# EAGLE board MicroMod_Environmental-Panel (EAGLE 9.6.2)
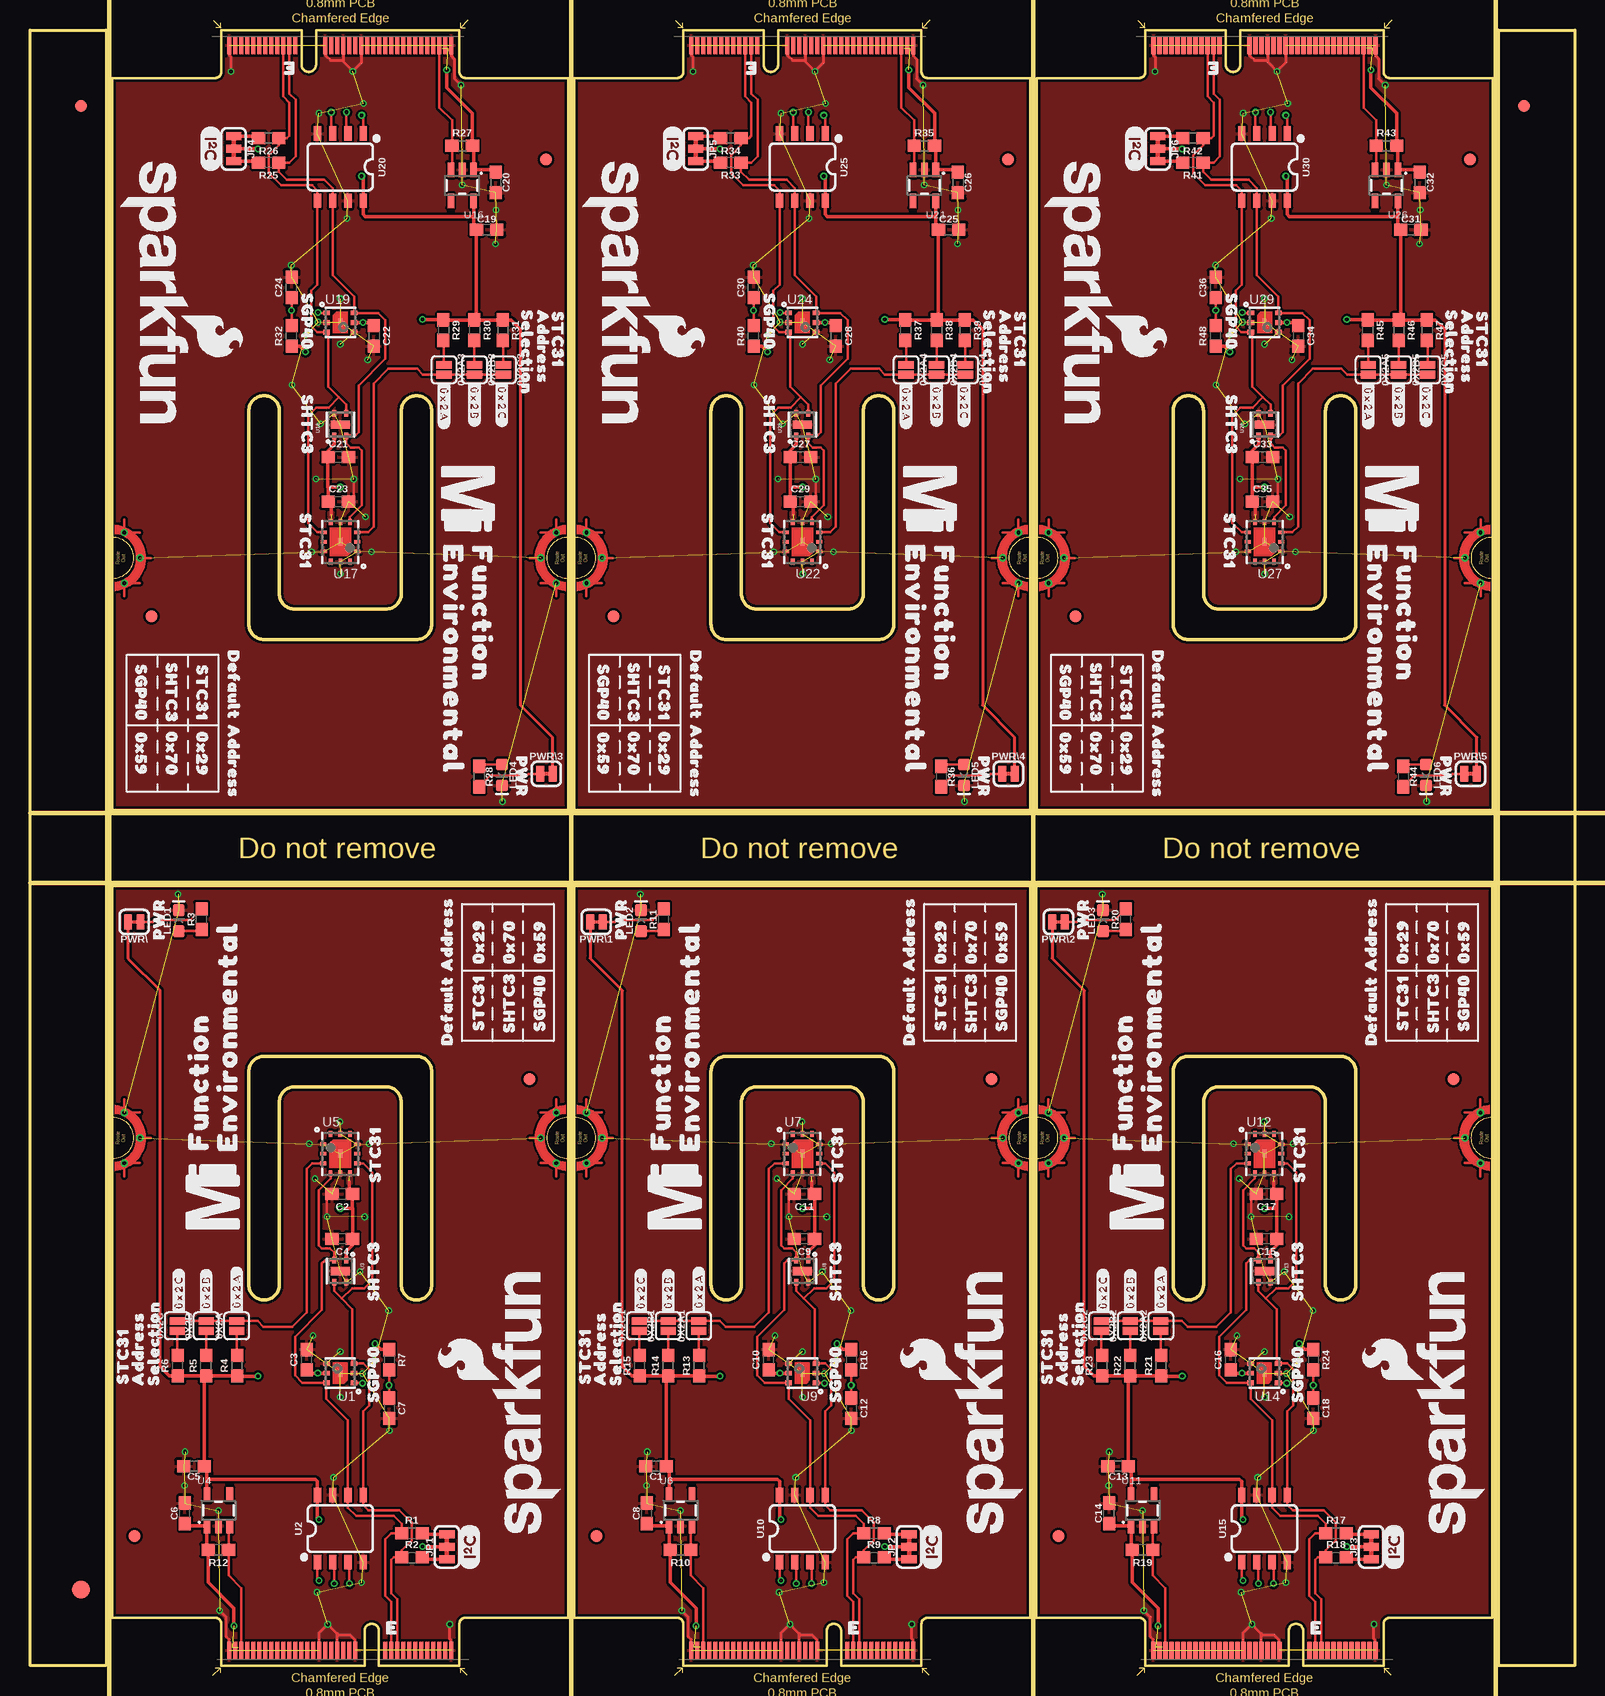
[diagram p0: board, top side]
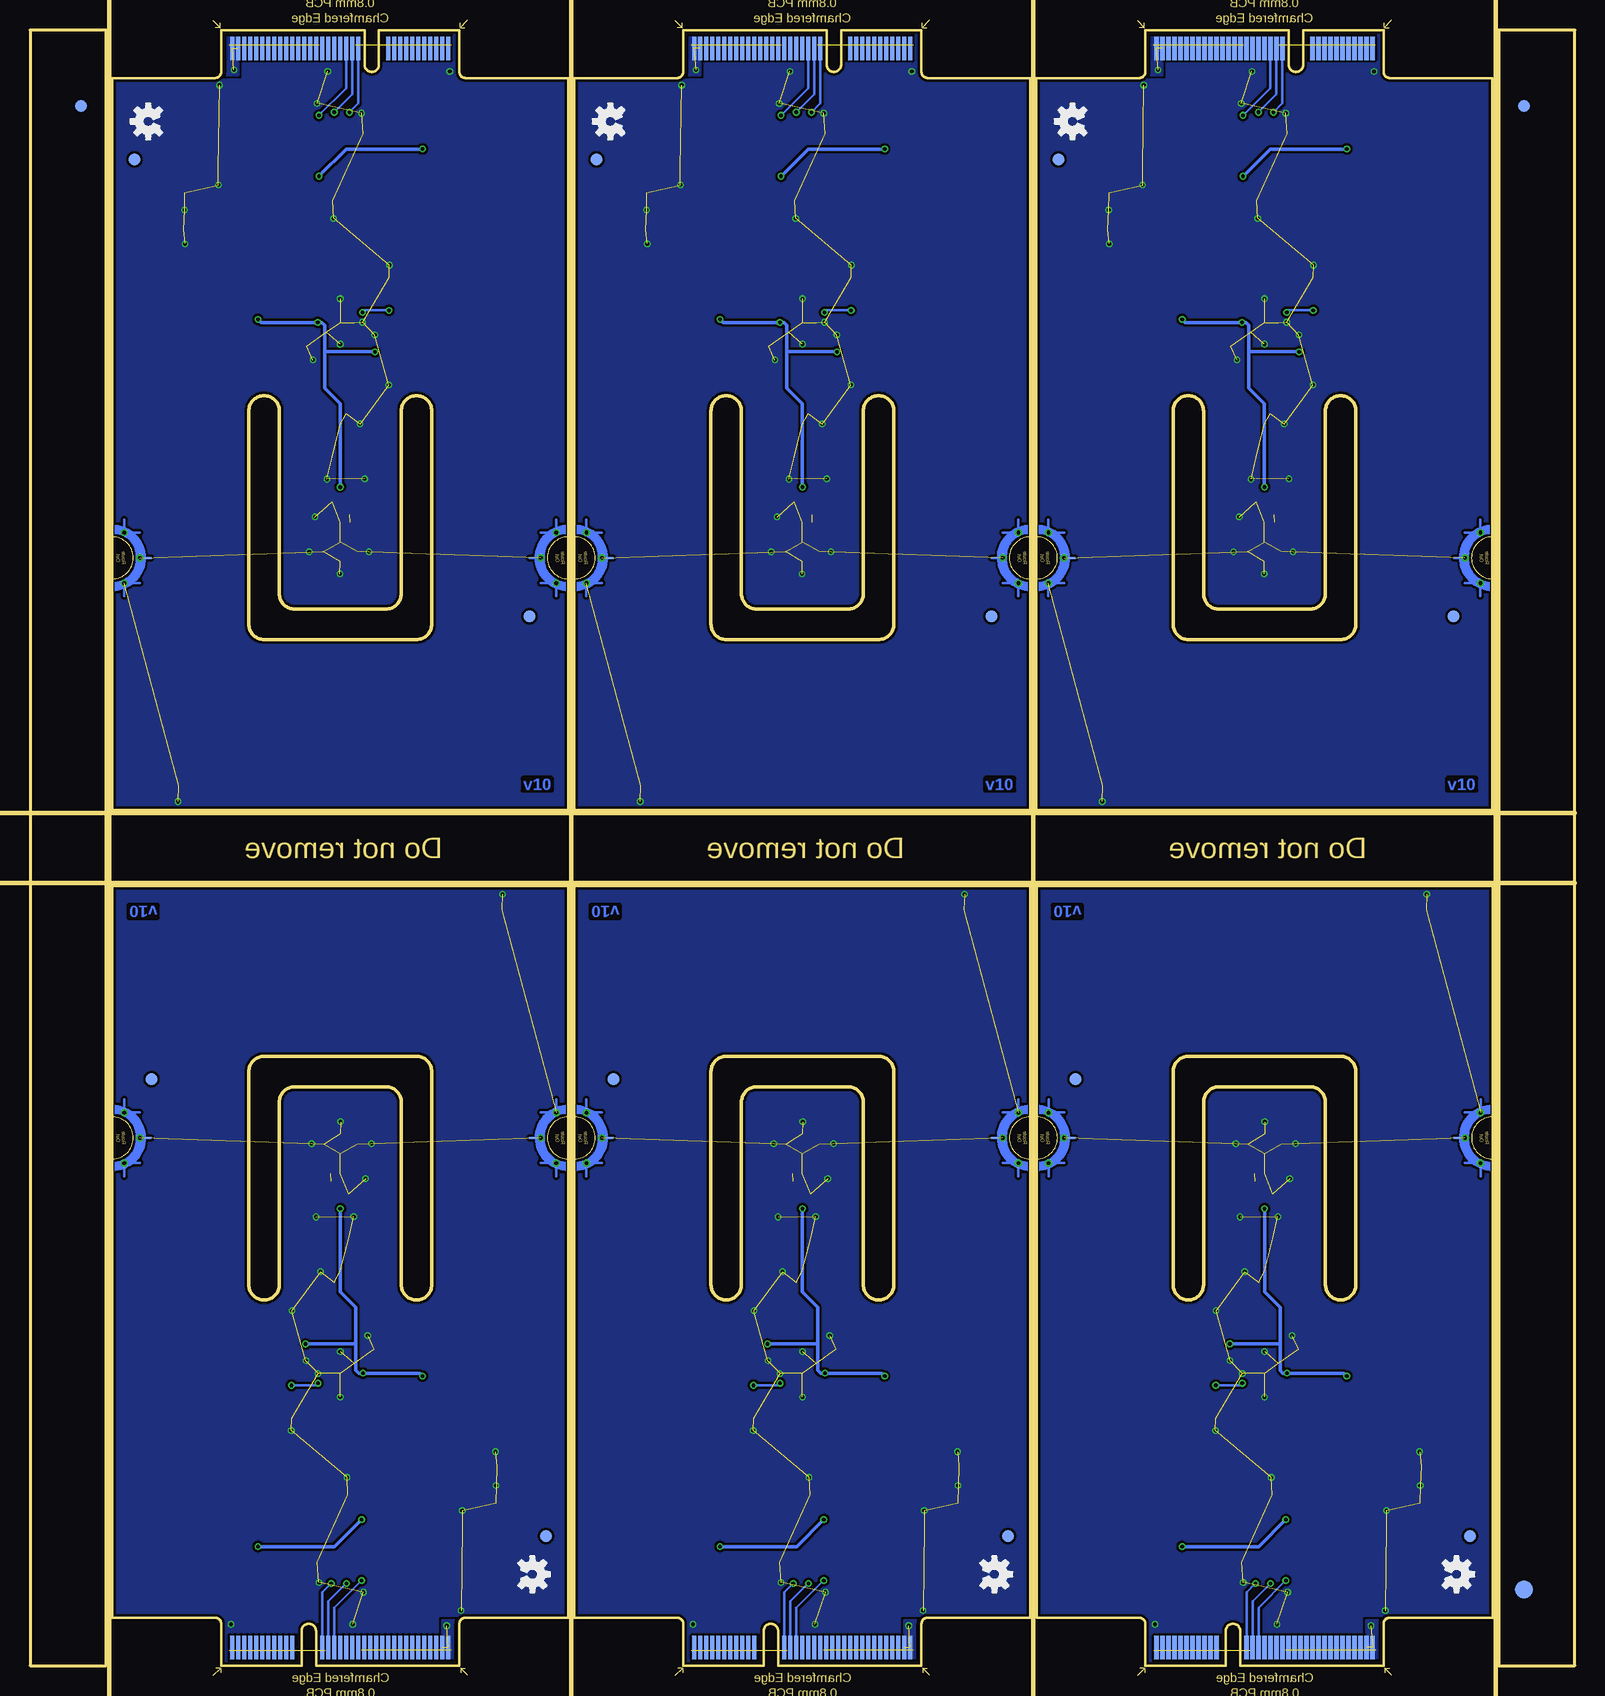
[diagram p1: board, bottom side, seen from below]

Size 128.73 x 136.35 mm. Coordinates in mm from the lower left corner, seen from the top.
Outline: 35.78,0 29.08,0 29.08,2.9 arc180 27.88,2.9 27.88,0 15.93,0 15.93,3.5 arc84 15.46,4 6.86,4 6.86,65 44.86,65 44.86,4 36.26,4 arc85 35.78,3.5 35.78,0
Outline: 32.21,30.48 arc90 33.48,31.75 33.48,49.53 arc90 32.21,50.8 19.51,50.8 arc90 18.24,49.53 18.24,31.75 arc90 19.51,30.48 arc90 20.78,31.75 20.78,46.99 arc-90 22.05,48.26 29.67,48.26 arc-90 30.94,46.99 30.94,31.75 arc90 32.21,30.48
Outline: 74.29,0 67.59,0 67.59,2.9 arc180 66.39,2.9 66.39,0 54.44,0 54.44,3.5 arc84 53.97,4 45.37,4 45.37,65 83.37,65 83.37,4 74.77,4 arc85 74.29,3.5 74.29,0
Outline: 70.72,30.48 arc90 71.99,31.75 71.99,49.53 arc90 70.72,50.8 58.02,50.8 arc90 56.75,49.53 56.75,31.75 arc90 58.02,30.48 arc90 59.29,31.75 59.29,46.99 arc-90 60.56,48.26 68.18,48.26 arc-90 69.45,46.99 69.45,31.75 arc90 70.72,30.48
Outline: 112.8,0 106.1,0 106.1,2.9 arc180 104.9,2.9 104.9,0 92.95,0 92.95,3.5 arc84 92.47,4 83.87,4 83.87,65 121.87,65 121.87,4 113.27,4 arc85 112.8,3.5 112.8,0
Outline: 109.22,30.48 arc90 110.49,31.75 110.49,49.53 arc90 109.22,50.8 96.52,50.8 arc90 95.25,49.53 95.25,31.75 arc90 96.52,30.48 arc90 97.79,31.75 97.79,46.99 arc-90 99.06,48.26 106.68,48.26 arc-90 107.95,46.99 107.95,31.75 arc90 109.22,30.48
Outline: 15.93,136.35 22.63,136.35 22.63,133.45 arc180 23.84,133.45 23.84,136.35 35.78,136.35 35.78,132.85 arc84 36.26,132.35 44.86,132.35 44.86,71.35 6.86,71.35 6.86,132.35 15.46,132.35 arc85 15.93,132.85 15.93,136.35
Outline: 19.51,105.87 arc90 18.24,104.6 18.24,86.82 arc90 19.51,85.55 32.21,85.55 arc90 33.48,86.82 33.48,104.6 arc90 32.21,105.87 arc90 30.94,104.6 30.94,89.36 arc-90 29.67,88.09 22.05,88.09 arc-90 20.78,89.36 20.78,104.6 arc90 19.51,105.87
Outline: 54.44,136.35 61.14,136.35 61.14,133.45 arc180 62.34,133.45 62.34,136.35 74.29,136.35 74.29,132.85 arc84 74.77,132.35 83.37,132.35 83.37,71.35 45.37,71.35 45.37,132.35 53.97,132.35 arc85 54.44,132.85 54.44,136.35
Outline: 58.02,105.87 arc90 56.75,104.6 56.75,86.82 arc90 58.02,85.55 70.72,85.55 arc90 71.99,86.82 71.99,104.6 arc90 70.72,105.87 arc90 69.45,104.6 69.45,89.36 arc-90 68.18,88.09 60.56,88.09 arc-90 59.29,89.36 59.29,104.6 arc90 58.02,105.87
Outline: 92.95,136.35 99.65,136.35 99.65,133.45 arc180 100.85,133.45 100.85,136.35 112.8,136.35 112.8,132.85 arc84 113.28,132.35 121.88,132.35 121.88,71.35 83.88,71.35 83.88,132.35 92.48,132.35 arc85 92.95,132.85 92.95,136.35
Outline: 96.53,105.87 arc90 95.26,104.6 95.26,86.82 arc90 96.53,85.55 109.23,85.55 arc90 110.5,86.82 110.5,104.6 arc90 109.23,105.87 arc90 107.95,104.6 107.95,89.36 arc-90 106.69,88.09 99.06,88.09 arc-90 97.8,89.36 97.8,104.6 arc90 96.53,105.87
Outline: 122.38,136.35 128.73,136.35 128.73,0 122.38,0 122.38,136.35
Outline: 0,136.35 6.35,136.35 6.35,0 0,0 0,136.35
Copper layers (1*16): Top 0.035mm / dielectric 1.5mm / Bottom 0.035mm
Design rules "MicroMod_Environmental": minimum track width 5mil, minimum drill 0.3mm, track to track 5mil, track to pad 5mil, pad to pad 5mil, via to via 5mil, smd to smd 5mil, copper to edge 7mil, drill to drill 7mil, minimum pad ring 5mil, minimum via ring 5mil, stop-mask expansion 2.5mil, vias tented up to drill 25mil, thermal gap 10mil
Milling: 6 lines

## Footprints (pad centres in the part's own frame; a part is rotated, then mirrored left to right if it is on the bottom)
SMT-JUMPER_2_NO_SILK = smd 0.635 x 1.27: 1 -0.406,0; 2 0.406,0
0603 = smd 1.1 x 1: 1 -0.85,0; 2 0.85,0
FIDUCIAL-1X2 = smd 1 x 1: 1 0,0
FIDUCIAL-1.5X3 = smd 1.5 x 1.5: 1 0,0
M.2-CARD-E-22_FUNCTION_STANDARD = smd 0.35 x 1.45: 1 9.25,1.275; 3 8.75,1.275; 5 8.25,1.275; 7 7.75,1.275; 9 7.25,1.275; 11 6.75,1.275; 13 6.25,1.275; 15 5.75,1.275; 17 5.25,1.275; 19 4.75,1.275; 21 4.25,1.275; 23 3.75,1.275; 33 1.25,1.275; 35 0.75,1.275; 37 0.25,1.275; 39 -0.25,1.275; 41 -0.75,1.275; 43 -1.25,1.275; 45 -1.75,1.275; 47 -2.25,1.275; 49 -2.75,1.275; 51 -3.25,1.275; 53 -3.75,1.275; 55 -4.25,1.275; 57 -4.75,1.275; 59 -5.25,1.275; 61 -5.75,1.275; 63 -6.25,1.275; 65 -6.75,1.275; 67 -7.25,1.275; 69 -7.75,1.275; 71 -8.25,1.275; 73 -8.75,1.275; 75 -9.25,1.275 | smd 0.35 x 1.95 bottom: 2 9,1.525; 4 8.5,1.525; 6 8,1.525; 8 7.5,1.525; 10 7,1.525; 12 6.5,1.525; 14 6,1.525; 16 5.5,1.525; 18 5,1.525; 20 4.5,1.525; 22 4,1.525; 32 1.5,1.525; 34 1,1.525; 36 0.5,1.525; 38 0,1.525; 40 -0.5,1.525; 42 -1,1.525; 44 -1.5,1.525; 46 -2,1.525; 48 -2.5,1.525; 50 -3,1.525; 52 -3.5,1.525; 54 -4,1.525; 56 -4.5,1.525; 58 -5,1.525; 60 -5.5,1.525; 62 -6,1.525; 64 -6.5,1.525; 66 -7,1.525; 68 -7.5,1.525; 70 -8,1.525; 72 -8.5,1.525; 74 -9,1.525 | drill 0.305 pad 0.61: GND1 -18,41.9; GND2 -16.7,44; GND3 -18,46.1; GND4 18,41.9; GND5 16.7,44; GND6 18,46.1
SMT-JUMPER_3_2-NC_TRACE_SILK = smd 0.66 x 1.27: 1 -1.041,0; 2 0,0; 3 1.041,0
LED-0603 = smd 1 x 1: A -0.877,0; C 0.877,0
SMT-JUMPER_2_NC_TRACE_SILK = smd 0.66 x 1.27: 1 -0.521,0; 2 0.521,0
SGP40 = smd 0.55 x 0.4: 1 -1.15,0.8; 2 -1.15,0; 3 -1.15,-0.8; 4 1.15,-0.8; 5 1.15,0; 6 1.15,0.8 | smd 0.305 x 0.61: DIEPAD 0,0
SO08 = smd 0.6 x 1.2: 1 -1.905,-2.8; 2 -0.635,-2.8; 3 0.635,-2.8; 4 1.905,-2.8; 5 1.905,2.8; 6 0.635,2.8; 7 -0.635,2.8; 8 -1.905,2.8
SHTC3 = smd 0.55 x 0.35: 1 -0.925,0.5; 2 -0.925,-0.5; 3 0.925,-0.5; 4 0.925,0.5 | smd 0.7 x 1.6: 5 0,0
SOT23-5 = smd 0.55 x 1.2: 1 -0.95,-1.3; 2 0,-1.3; 3 0.95,-1.3; 4 0.95,1.3; 5 -0.95,1.3
STC31 = smd 0.5 x 0.3: 1 -1.4,0.8; 2 -1.4,0; 3 -1.4,-0.8; 7 1.4,-0.8; 8 1.4,0; 9 1.4,0.8 | smd 0.3 x 0.5: 4 -0.8,-1.65; 5 0,-1.65; 6 0.8,-1.65; 10 0.8,1.65; 11 0,1.65; 12 -0.8,1.65 | smd 0.305 x 0.61: DIEPAD 0,0

## Placement (x,y rotation side)
0X2A  JUMPER-SMT_2_NO_SILK  [SMT-JUMPER_2_NO_SILK]  17.22,28.32 90 top
0X2A1  JUMPER-SMT_2_NO_SILK  [SMT-JUMPER_2_NO_SILK]  55.73,28.32 90 top
0X2A2  JUMPER-SMT_2_NO_SILK  [SMT-JUMPER_2_NO_SILK]  94.24,28.32 90 top
0X2A3  JUMPER-SMT_2_NO_SILK  [SMT-JUMPER_2_NO_SILK]  34.5,108.03 270 top
0X2A4  JUMPER-SMT_2_NO_SILK  [SMT-JUMPER_2_NO_SILK]  73,108.03 270 top
0X2A5  JUMPER-SMT_2_NO_SILK  [SMT-JUMPER_2_NO_SILK]  111.51,108.03 270 top
0X2B  JUMPER-SMT_2_NO_SILK  [SMT-JUMPER_2_NO_SILK]  14.68,28.32 90 top
0X2B1  JUMPER-SMT_2_NO_SILK  [SMT-JUMPER_2_NO_SILK]  53.19,28.32 90 top
0X2B2  JUMPER-SMT_2_NO_SILK  [SMT-JUMPER_2_NO_SILK]  91.7,28.32 90 top
0X2B3  JUMPER-SMT_2_NO_SILK  [SMT-JUMPER_2_NO_SILK]  37.04,108.03 270 top
0X2B4  JUMPER-SMT_2_NO_SILK  [SMT-JUMPER_2_NO_SILK]  75.54,108.03 270 top
0X2B5  JUMPER-SMT_2_NO_SILK  [SMT-JUMPER_2_NO_SILK]  114.05,108.03 270 top
0X2C  JUMPER-SMT_2_NO_SILK  [SMT-JUMPER_2_NO_SILK]  12.27,28.32 90 top
0X2C1  JUMPER-SMT_2_NO_SILK  [SMT-JUMPER_2_NO_SILK]  50.78,28.32 90 top
0X2C2  JUMPER-SMT_2_NO_SILK  [SMT-JUMPER_2_NO_SILK]  89.28,28.32 90 top
0X2C3  JUMPER-SMT_2_NO_SILK  [SMT-JUMPER_2_NO_SILK]  39.45,108.03 270 top
0X2C4  JUMPER-SMT_2_NO_SILK  [SMT-JUMPER_2_NO_SILK]  77.96,108.03 270 top
0X2C5  JUMPER-SMT_2_NO_SILK  [SMT-JUMPER_2_NO_SILK]  116.46,108.03 270 top
C1  1.0uF  [0603]  52.17,16.64 180 top
C2  1.0uF  [0603]  26.02,39.32 180 top
C3  0.1uF  [0603]  23.06,25.5 90 top
C4  0.1uF  [0603]  26.02,35.59 180 top
C5  1.0uF  [0603]  13.67,16.64 180 top
C6  1.0uF  [0603]  12.9,12.7 90 top
C7  1.0uF  [0603]  29.92,21.46 270 top
C8  1.0uF  [0603]  51.41,12.7 90 top
C9  0.1uF  [0603]  64.53,35.59 180 top
C10  0.1uF  [0603]  61.57,25.5 90 top
C11  1.0uF  [0603]  64.53,39.32 180 top
C12  1.0uF  [0603]  68.43,21.46 270 top
C13  1.0uF  [0603]  90.68,16.64 180 top
C14  1.0uF  [0603]  89.92,12.7 90 top
C15  0.1uF  [0603]  103.04,35.59 180 top
C16  0.1uF  [0603]  100.08,25.5 90 top
C17  1.0uF  [0603]  103.04,39.32 180 top
C18  1.0uF  [0603]  106.94,21.46 270 top
C19  1.0uF  [0603]  38.05,119.71 0 top
C20  1.0uF  [0603]  38.81,123.65 270 top
C21  0.1uF  [0603]  25.69,100.76 0 top
C22  0.1uF  [0603]  28.65,110.85 270 top
C23  1.0uF  [0603]  25.69,97.03 0 top
C24  1.0uF  [0603]  21.8,114.89 90 top
C25  1.0uF  [0603]  76.56,119.71 0 top
C26  1.0uF  [0603]  77.32,123.65 270 top
C27  0.1uF  [0603]  64.2,100.76 0 top
C28  0.1uF  [0603]  67.16,110.85 270 top
C29  1.0uF  [0603]  64.2,97.03 0 top
C30  1.0uF  [0603]  60.3,114.89 90 top
C31  1.0uF  [0603]  115.07,119.71 0 top
C32  1.0uF  [0603]  115.83,123.65 270 top
C33  0.1uF  [0603]  102.71,100.76 0 top
C34  0.1uF  [0603]  105.67,110.85 270 top
C35  1.0uF  [0603]  102.71,97.03 0 top
C36  1.0uF  [0603]  98.81,114.89 90 top
E$1  [FIDUCIAL-1X2]  4.23,130 0 top
E$2  [FIDUCIAL-1X2]  4.23,130 0 bottom
E$3  [FIDUCIAL-1X2]  124.5,130 0 top
E$4  [FIDUCIAL-1X2]  124.5,130 0 bottom
E$5  [FIDUCIAL-1.5X3]  4.23,6.35 0 top
E$6  [FIDUCIAL-1.5X3]  4.23,6.35 0 bottom
FD1  FIDUCIAL1X2  [FIDUCIAL-1X2]  8.71,10.79 90 top
FD2  FIDUCIAL1X2  [FIDUCIAL-1X2]  8.71,10.79 270 bottom
FD3  FIDUCIAL1X2  [FIDUCIAL-1X2]  41.61,48.9 270 bottom
FD4  FIDUCIAL1X2  [FIDUCIAL-1X2]  41.61,48.9 90 top
FD5  FIDUCIAL1X2  [FIDUCIAL-1X2]  47.22,10.79 90 top
FD6  FIDUCIAL1X2  [FIDUCIAL-1X2]  47.22,10.79 270 bottom
FD7  FIDUCIAL1X2  [FIDUCIAL-1X2]  80.11,48.9 270 bottom
FD8  FIDUCIAL1X2  [FIDUCIAL-1X2]  80.11,48.9 90 top
FD9  FIDUCIAL1X2  [FIDUCIAL-1X2]  85.73,10.79 90 top
FD10  FIDUCIAL1X2  [FIDUCIAL-1X2]  85.73,10.79 270 bottom
FD11  FIDUCIAL1X2  [FIDUCIAL-1X2]  118.62,48.9 270 bottom
FD12  FIDUCIAL1X2  [FIDUCIAL-1X2]  118.62,48.9 90 top
FD13  FIDUCIAL1X2  [FIDUCIAL-1X2]  43,125.55 270 top
FD14  FIDUCIAL1X2  [FIDUCIAL-1X2]  43,125.55 90 bottom
FD15  FIDUCIAL1X2  [FIDUCIAL-1X2]  10.11,87.45 90 bottom
FD16  FIDUCIAL1X2  [FIDUCIAL-1X2]  10.11,87.45 270 top
FD17  FIDUCIAL1X2  [FIDUCIAL-1X2]  81.51,125.55 270 top
FD18  FIDUCIAL1X2  [FIDUCIAL-1X2]  81.51,125.55 90 bottom
FD19  FIDUCIAL1X2  [FIDUCIAL-1X2]  48.62,87.45 90 bottom
FD20  FIDUCIAL1X2  [FIDUCIAL-1X2]  48.62,87.45 270 top
FD21  FIDUCIAL1X2  [FIDUCIAL-1X2]  120.02,125.55 270 top
FD22  FIDUCIAL1X2  [FIDUCIAL-1X2]  120.02,125.55 90 bottom
FD23  FIDUCIAL1X2  [FIDUCIAL-1X2]  87.13,87.45 90 bottom
FD24  FIDUCIAL1X2  [FIDUCIAL-1X2]  87.13,87.45 270 top
J1  MICROMOD_STANDARD  [M.2-CARD-E-22_FUNCTION_STANDARD]  25.86,0 0 top
J2  MICROMOD_STANDARD  [M.2-CARD-E-22_FUNCTION_STANDARD]  64.37,0 0 top
J3  MICROMOD_STANDARD  [M.2-CARD-E-22_FUNCTION_STANDARD]  102.87,0 0 top
J4  MICROMOD_STANDARD  [M.2-CARD-E-22_FUNCTION_STANDARD]  25.86,136.35 180 top
J5  MICROMOD_STANDARD  [M.2-CARD-E-22_FUNCTION_STANDARD]  64.37,136.35 180 top
J6  MICROMOD_STANDARD  [M.2-CARD-E-22_FUNCTION_STANDARD]  102.88,136.35 180 top
JP1  JUMPER-SMT_3_2-NC_TRACE_SILK  [SMT-JUMPER_3_2-NC_TRACE_SILK]  34.75,9.91 90 top
JP2  JUMPER-SMT_3_2-NC_TRACE_SILK  [SMT-JUMPER_3_2-NC_TRACE_SILK]  73.26,9.91 90 top
JP3  JUMPER-SMT_3_2-NC_TRACE_SILK  [SMT-JUMPER_3_2-NC_TRACE_SILK]  111.76,9.91 90 top
JP4  JUMPER-SMT_3_2-NC_TRACE_SILK  [SMT-JUMPER_3_2-NC_TRACE_SILK]  16.97,126.44 270 top
JP5  JUMPER-SMT_3_2-NC_TRACE_SILK  [SMT-JUMPER_3_2-NC_TRACE_SILK]  55.48,126.44 270 top
JP6  JUMPER-SMT_3_2-NC_TRACE_SILK  [SMT-JUMPER_3_2-NC_TRACE_SILK]  93.99,126.44 270 top
LED1  RED  [LED-0603]  12.4,62.1 90 top
LED2  RED  [LED-0603]  50.9,62.1 90 top
LED3  RED  [LED-0603]  89.41,62.1 90 top
LED4  RED  [LED-0603]  39.32,74.25 270 top
LED5  RED  [LED-0603]  77.83,74.25 270 top
LED6  RED  [LED-0603]  116.34,74.25 270 top
LOGO1  SFE_LOGO_NAME_FLAME.2_INCH  [SFE_LOGO_NAME_FLAME_.2]  41.35,21.97 90 top
LOGO2  OSHW-LOGOS  [OSHW-LOGO-S]  9.86,7.62 270 bottom
LOGO3  SFE_LOGO_NAME_FLAME.2_INCH  [SFE_LOGO_NAME_FLAME_.2]  79.86,21.97 90 top
LOGO4  OSHW-LOGOS  [OSHW-LOGO-S]  48.36,7.62 270 bottom
LOGO5  SFE_LOGO_NAME_FLAME.2_INCH  [SFE_LOGO_NAME_FLAME_.2]  118.37,21.97 90 top
LOGO6  OSHW-LOGOS  [OSHW-LOGO-S]  86.87,7.62 270 bottom
LOGO7  SFE_LOGO_NAME_FLAME.2_INCH  [SFE_LOGO_NAME_FLAME_.2]  10.37,114.38 270 top
LOGO8  OSHW-LOGOS  [OSHW-LOGO-S]  41.86,128.73 90 bottom
LOGO9  SFE_LOGO_NAME_FLAME.2_INCH  [SFE_LOGO_NAME_FLAME_.2]  48.87,114.38 270 top
LOGO10  OSHW-LOGOS  [OSHW-LOGO-S]  80.37,128.73 90 bottom
LOGO11  SFE_LOGO_NAME_FLAME.2_INCH  [SFE_LOGO_NAME_FLAME_.2]  87.38,114.38 270 top
LOGO12  OSHW-LOGOS  [OSHW-LOGO-S]  118.88,128.73 90 bottom
PWR\  JUMPER-SMT_2_NC_TRACE_SILK  [SMT-JUMPER_2_NC_TRACE_SILK]  8.69,62 180 top
PWR\1  JUMPER-SMT_2_NC_TRACE_SILK  [SMT-JUMPER_2_NC_TRACE_SILK]  47.2,62 180 top
PWR\2  JUMPER-SMT_2_NC_TRACE_SILK  [SMT-JUMPER_2_NC_TRACE_SILK]  85.7,62 180 top
PWR\3  JUMPER-SMT_2_NC_TRACE_SILK  [SMT-JUMPER_2_NC_TRACE_SILK]  43.03,74.35 0 top
PWR\4  JUMPER-SMT_2_NC_TRACE_SILK  [SMT-JUMPER_2_NC_TRACE_SILK]  81.54,74.35 0 top
PWR\5  JUMPER-SMT_2_NC_TRACE_SILK  [SMT-JUMPER_2_NC_TRACE_SILK]  120.05,74.35 0 top
R1  4.7k  [0603]  31.83,11.05 0 top
R2  4.7k  [0603]  31.83,9.02 0 top
R3  1k  [0603]  14.3,62.23 90 top
R4  10k  [0603]  17.27,25.02 90 top
R5  3.3k  [0603]  14.68,25.02 90 top
R6  1k  [0603]  12.32,25.02 90 top
R7  4.7  [0603]  29.92,25.5 270 top
R8  4.7k  [0603]  70.34,11.05 0 top
R9  4.7k  [0603]  70.34,9.02 0 top
R10  100k  [0603]  54.21,9.65 180 top
R11  1k  [0603]  52.81,62.23 90 top
R12  100k  [0603]  15.7,9.65 180 top
R13  10k  [0603]  55.78,25.02 90 top
R14  3.3k  [0603]  53.19,25.02 90 top
R15  1k  [0603]  50.83,25.02 90 top
R16  4.7  [0603]  68.43,25.5 270 top
R17  4.7k  [0603]  108.84,11.05 0 top
R18  4.7k  [0603]  108.84,9.02 0 top
R19  100k  [0603]  92.71,9.65 180 top
R20  1k  [0603]  91.32,62.23 90 top
R21  10k  [0603]  94.29,25.02 90 top
R22  3.3k  [0603]  91.7,25.02 90 top
R23  1k  [0603]  89.33,25.02 90 top
R24  4.7  [0603]  106.94,25.5 270 top
R25  4.7k  [0603]  19.89,125.3 180 top
R26  4.7k  [0603]  19.89,127.33 180 top
R27  100k  [0603]  36.02,126.7 0 top
R28  1k  [0603]  37.42,74.12 270 top
R29  10k  [0603]  34.44,111.33 270 top
R30  3.3k  [0603]  37.04,111.33 270 top
R31  1k  [0603]  39.4,111.33 270 top
R32  4.7  [0603]  21.8,110.85 90 top
R33  4.7k  [0603]  58.4,125.3 180 top
R34  4.7k  [0603]  58.4,127.33 180 top
R35  100k  [0603]  74.53,126.7 0 top
R36  1k  [0603]  75.92,74.12 270 top
R37  10k  [0603]  72.95,111.33 270 top
R38  3.3k  [0603]  75.54,111.33 270 top
R39  1k  [0603]  77.9,111.33 270 top
R40  4.7  [0603]  60.3,110.85 90 top
R41  4.7k  [0603]  96.91,125.3 180 top
R42  4.7k  [0603]  96.91,127.33 180 top
R43  100k  [0603]  113.04,126.7 0 top
R44  1k  [0603]  114.43,74.12 270 top
R45  10k  [0603]  111.46,111.33 270 top
R46  3.3k  [0603]  114.05,111.33 270 top
R47  1k  [0603]  116.41,111.33 270 top
R48  4.7  [0603]  98.81,110.85 90 top
U1  SGP40  [SGP40]  25.86,24.38 180 top
U2  EEPROM  [SO08]  25.86,11.43 0 top
U3  SHTC3  [SHTC3]  25.86,32.89 270 top
U4  3.3V  [SOT23-5]  15.7,12.95 0 top
U5  STC31  [STC31]  25.86,42.67 0 top
U6  3.3V  [SOT23-5]  54.21,12.95 0 top
U7  STC31  [STC31]  64.37,42.67 0 top
U8  SHTC3  [SHTC3]  64.37,32.89 270 top
U9  SGP40  [SGP40]  64.37,24.38 180 top
U10  EEPROM  [SO08]  64.37,11.43 0 top
U11  3.3V  [SOT23-5]  92.71,12.95 0 top
U12  STC31  [STC31]  102.87,42.67 0 top
U13  SHTC3  [SHTC3]  102.87,32.89 270 top
U14  SGP40  [SGP40]  102.87,24.38 180 top
U15  EEPROM  [SO08]  102.87,11.43 0 top
U16  3.3V  [SOT23-5]  36.02,123.4 180 top
U17  STC31  [STC31]  25.86,93.68 180 top
U18  SHTC3  [SHTC3]  25.86,103.46 90 top
U19  SGP40  [SGP40]  25.86,111.97 0 top
U20  EEPROM  [SO08]  25.86,124.92 180 top
U21  3.3V  [SOT23-5]  74.53,123.4 180 top
U22  STC31  [STC31]  64.37,93.68 180 top
U23  SHTC3  [SHTC3]  64.37,103.46 90 top
U24  SGP40  [SGP40]  64.37,111.97 0 top
U25  EEPROM  [SO08]  64.37,124.92 180 top
U26  3.3V  [SOT23-5]  113.04,123.4 180 top
U27  STC31  [STC31]  102.88,93.68 180 top
U28  SHTC3  [SHTC3]  102.88,103.46 90 top
U29  SGP40  [SGP40]  102.88,111.97 0 top
U30  EEPROM  [SO08]  102.88,124.92 180 top
U$1  [#0X2A#21]  17.22,31.24 90 top
U$2  [#0X2B#21]  14.68,31.11 90 top
U$3  [#0X2C#21]  12.4,31.11 90 top
U$4  [PWR321541]  10.74,62.23 90 top
U$5  [FUNCTION524]  14.05,48.64 90 top
U$6  [ENVIRONMENTAL526]  16.46,52.45 90 top
U$7  [MICROMOD_MI_LOGO_1]  15.19,39.12 90 top
U$8  [I2C]  36.65,8 90 top
U$9  [ADDRESS40313505]  8.99,26.42 90 top
U$10  [0X2940313520]  37.39,60.35 90 top
U$11  [SGP40313503]  28.63,24.33 90 top
U$12  [SHTC3501]  28.63,32.92 90 top
U$13  [STC313502]  7.75,25.81 90 top
U$14  [DEFAULT40313504]  34.75,54.61 90 top
U$15  [ADDRESS40313505]  34.75,60.96 90 top
U$16  [STC313502]  37.39,55.27 90 top
U$17  [SHTC3501]  39.93,55.27 90 top
U$18  [SGP40313503]  42.47,55.27 90 top
U$19  [0X5940313520]  42.47,60.35 90 top
U$20  [0X7040313520]  39.93,60.35 90 top
U$21  [SELECTION40313506]  10.31,26.87 90 top
U$22  [STC313502]  28.78,42.62 90 top
U$23  [#0X2A#21]  55.73,31.24 90 top
U$24  [#0X2B#21]  53.19,31.11 90 top
U$25  [#0X2C#21]  50.9,31.11 90 top
U$26  [PWR321541]  49.25,62.23 90 top
U$27  [FUNCTION524]  52.56,48.64 90 top
U$28  [ENVIRONMENTAL526]  54.97,52.45 90 top
U$29  [MICROMOD_MI_LOGO_1]  53.7,39.12 90 top
U$30  [I2C]  75.16,8 90 top
U$31  [SGP40313503]  67.13,24.33 90 top
U$32  [SHTC3501]  67.13,32.92 90 top
U$33  [STC313502]  46.26,25.81 90 top
U$34  [DEFAULT40313504]  73.26,54.61 90 top
U$35  [ADDRESS40313505]  73.26,60.96 90 top
U$36  [STC313502]  75.9,55.27 90 top
U$37  [SHTC3501]  78.44,55.27 90 top
U$38  [SGP40313503]  80.98,55.27 90 top
U$39  [0X2940313520]  75.9,60.35 90 top
U$40  [0X5940313520]  80.98,60.35 90 top
U$41  [0X7040313520]  78.44,60.35 90 top
U$42  [ADDRESS40313505]  47.5,26.42 90 top
U$43  [SELECTION40313506]  48.82,26.87 90 top
U$44  [STC313502]  67.29,42.62 90 top
U$45  [#0X2A#21]  94.24,31.24 90 top
U$46  [#0X2B#21]  91.7,31.11 90 top
U$47  [#0X2C#21]  89.41,31.11 90 top
U$48  [PWR321541]  87.76,62.23 90 top
U$49  [FUNCTION524]  91.06,48.64 90 top
U$50  [ENVIRONMENTAL526]  93.47,52.45 90 top
U$51  [MICROMOD_MI_LOGO_1]  92.2,39.12 90 top
U$52  [I2C]  113.67,8 90 top
U$53  [SGP40313503]  105.64,24.33 90 top
U$54  [SHTC3501]  105.64,32.92 90 top
U$55  [STC313502]  84.76,25.81 90 top
U$56  [DEFAULT40313504]  111.76,54.61 90 top
U$57  [ADDRESS40313505]  111.76,60.96 90 top
U$58  [STC313502]  114.4,55.27 90 top
U$59  [SHTC3501]  116.94,55.27 90 top
U$60  [SGP40313503]  119.48,55.27 90 top
U$61  [0X2940313520]  114.4,60.35 90 top
U$62  [0X5940313520]  119.48,60.35 90 top
U$63  [0X7040313520]  116.94,60.35 90 top
U$64  [ADDRESS40313505]  86.01,26.42 90 top
U$65  [SELECTION40313506]  87.33,26.87 90 top
U$66  [STC313502]  105.79,42.62 90 top
U$67  [#0X2A#21]  34.5,105.11 270 top
U$68  [#0X2B#21]  37.04,105.23 270 top
U$69  [#0X2C#21]  39.32,105.23 270 top
U$70  [PWR321541]  40.97,74.12 270 top
U$71  [FUNCTION524]  37.67,87.71 270 top
U$72  [ENVIRONMENTAL526]  35.26,83.9 270 top
U$73  [MICROMOD_MI_LOGO_1]  36.53,97.23 270 top
U$74  [I2C]  15.06,128.35 270 top
U$75  [SGP40313503]  23.09,112.02 270 top
U$76  [SHTC3501]  23.09,103.43 270 top
U$77  [STC313502]  43.97,110.54 270 top
U$78  [DEFAULT40313504]  16.97,81.74 270 top
U$79  [ADDRESS40313505]  16.97,75.39 270 top
U$80  [STC313502]  14.33,81.08 270 top
U$81  [SHTC3501]  11.79,81.08 270 top
U$82  [SGP40313503]  9.25,81.08 270 top
U$83  [0X2940313520]  14.33,76 270 top
U$84  [0X5940313520]  9.25,76 270 top
U$85  [0X7040313520]  11.79,76 270 top
U$86  [ADDRESS40313505]  42.73,109.93 270 top
U$87  [SELECTION40313506]  41.4,109.48 270 top
U$88  [STC313502]  22.94,93.73 270 top
U$89  [#0X2A#21]  73,105.11 270 top
U$90  [#0X2B#21]  75.54,105.23 270 top
U$91  [#0X2C#21]  77.83,105.23 270 top
U$92  [PWR321541]  79.48,74.12 270 top
U$93  [FUNCTION524]  76.18,87.71 270 top
U$94  [ENVIRONMENTAL526]  73.76,83.9 270 top
U$95  [MICROMOD_MI_LOGO_1]  75.03,97.23 270 top
U$96  [I2C]  53.57,128.35 270 top
U$97  [SGP40313503]  61.6,112.02 270 top
U$98  [SHTC3501]  61.6,103.43 270 top
U$99  [STC313502]  82.48,110.54 270 top
U$100  [DEFAULT40313504]  55.48,81.74 270 top
U$101  [ADDRESS40313505]  55.48,75.39 270 top
U$102  [STC313502]  52.83,81.08 270 top
U$103  [SHTC3501]  50.29,81.08 270 top
U$104  [SGP40313503]  47.75,81.08 270 top
U$105  [0X2940313520]  52.83,76 270 top
U$106  [0X5940313520]  47.75,76 270 top
U$107  [0X7040313520]  50.29,76 270 top
U$108  [ADDRESS40313505]  81.23,109.93 270 top
U$109  [SELECTION40313506]  79.91,109.48 270 top
U$110  [STC313502]  61.45,93.73 270 top
U$111  [#0X2A#21]  111.51,105.11 270 top
U$112  [#0X2B#21]  114.05,105.23 270 top
U$113  [#0X2C#21]  116.34,105.23 270 top
U$114  [PWR321541]  117.99,74.12 270 top
U$115  [FUNCTION524]  114.69,87.71 270 top
U$116  [ENVIRONMENTAL526]  112.27,83.9 270 top
U$117  [MICROMOD_MI_LOGO_1]  113.54,97.23 270 top
U$118  [I2C]  92.08,128.35 270 top
U$119  [SGP40313503]  100.11,112.02 270 top
U$120  [SHTC3501]  100.11,103.43 270 top
U$121  [STC313502]  120.99,110.54 270 top
U$122  [DEFAULT40313504]  93.99,81.74 270 top
U$123  [ADDRESS40313505]  93.99,75.39 270 top
U$124  [STC313502]  91.34,81.08 270 top
U$125  [SHTC3501]  88.8,81.08 270 top
U$126  [SGP40313503]  86.26,81.08 270 top
U$127  [0X2940313520]  91.34,76 270 top
U$128  [0X5940313520]  86.26,76 270 top
U$129  [0X7040313520]  88.8,76 270 top
U$130  [ADDRESS40313505]  119.74,109.93 270 top
U$131  [SELECTION40313506]  118.42,109.48 270 top
U$132  [STC313502]  99.95,93.73 270 top

## Library data of the parts
0X2A 0X2A1-0X2A5 0X2B 0X2B1-0X2B5 0X2C 0X2C1-0X2C5 JP1-JP6 PWR\ PWR\1-PWR\5 = SparkFun-Jumpers
C1 C5 C6 C8 C13 C14 C19 C20 C25 C26 C31 C32 = SparkFun-Capacitors; PROD_ID: CAP-00868
C2 C7 C11 C12 C17 C18 C23 C24 C29 C30 C35 C36 = SparkFun-Capacitors; PROD_ID: CAP-13930
C3 C4 C9 C10 C15 C16 C21 C22 C27 C28 C33 C34 = SparkFun-Capacitors; PROD_ID: CAP-08604
E$1-E$4 FD1-FD24 LOGO1-LOGO12 = SparkFun-Aesthetics
E$5 E$6 = SparkFun-Retired
J1-J6 = SparkFun-MicroMod-Function
LED1-LED6 = SparkFun-LED; PROD_ID: DIO-00819
R1 R2 R8 R9 R17 R18 R25 R26 R33 R34 R41 R42 = SparkFun-Resistors; PROD_ID: RES-07857
R3 R6 R11 R15 R20 R23 R28 R31 R36 R39 R44 R47 = SparkFun-Resistors; PROD_ID: RES-07856
R4 R13 R21 R29 R37 R45 = SparkFun-Resistors; PROD_ID: RES-00824
R5 R14 R22 R30 R38 R46 = SparkFun-Resistors; PROD_ID: RES-07851
R7 R16 R24 R32 R40 R48 = SparkFun-Resistors; PROD_ID: RES-15581
R10 R12 R19 R27 R35 R43 = SparkFun-Resistors; PROD_ID: RES-07828
U1 U9 U14 U19 U24 U29 = SparkFun-Sensors; DIGIKEY_PART: 1649-SGP40-D-R4CT-ND; PROD_ID: IC-15580
U2 U10 U15 U20 U25 U30 = SparkFun-IC-Memory; PROD_ID: IC-14645
U3 U8 U13 U18 U23 U28 = SparkFun-Sensors; PROD_ID: IC-14840
U4 U6 U11 U16 U21 U26 = SparkFun-IC-Power; PROD_ID: VREG-12457
U5 U7 U12 U17 U22 U27 = SparkFun-Sensors; MANU_PART: STC31-R3; PROD_ID: IC-16076
U$1-U$6 U$9-U$28 U$31-U$50 U$53-U$72 U$75-U$94 U$97-U$116 U$119-U$132 = top
U$7 U$29 U$51 U$73 U$95 U$117 = SparkFun-MicroMod
U$8 U$30 U$52 U$74 U$96 U$118 = SparkFun-Buzzard

## Nets
3.3V [Diff pairs]: C2.1 C3.1 C4.1 C5.1 JP1.2 PWR\.2 R4.1 R5.1 R6.1 R7.1 U1.5 U2.8 U3.1 U4.5 U5.6
3.3V1 [Diff pairs]: C1.1 C9.1 C10.1 C11.1 JP2.2 PWR\1.2 R13.1 R14.1 R15.1 R16.1 U6.5 U7.6 U8.1 U9.5 U10.8
3.3V2 [Diff pairs]: C13.1 C15.1 C16.1 C17.1 JP3.2 PWR\2.2 R21.1 R22.1 R23.1 R24.1 U11.5 U12.6 U13.1 U14.5 U15.8
3.3V3 [Diff pairs]: C19.1 C21.1 C22.1 C23.1 JP4.2 PWR\3.2 R29.1 R30.1 R31.1 R32.1 U16.5 U17.6 U18.1 U19.5 U20.8
3.3V4 [Diff pairs]: C25.1 C27.1 C28.1 C29.1 JP5.2 PWR\4.2 R37.1 R38.1 R39.1 R40.1 U21.5 U22.6 U23.1 U24.5 U25.8
3.3V5 [Diff pairs]: C31.1 C33.1 C34.1 C35.1 JP6.2 PWR\5.2 R45.1 R46.1 R47.1 R48.1 U26.5 U27.6 U28.1 U29.5 U30.8
A0: J1.36 U2.1
A1: J1.34 U2.2
A2: J1.32 U2.3
A3: J2.36 U10.1
A4: J2.32 U10.3
A5: J2.34 U10.2
A6: J3.36 U15.1
A7: J3.32 U15.3
A8: J3.34 U15.2
A9: J4.36 U20.1
A10: J4.32 U20.3
A11: J4.34 U20.2
A12: J5.36 U25.1
A13: J5.32 U25.3
A14: J5.34 U25.2
A15: J6.36 U30.1
A16: J6.32 U30.3
A17: J6.34 U30.2
ADDR: 0X2A.2 0X2B.2 0X2C.2 U5.3
ADDR1: 0X2A1.2 0X2B1.2 0X2C1.2 U7.3
ADDR2: 0X2A2.2 0X2B2.2 0X2C2.2 U12.3
ADDR3: 0X2A3.2 0X2B3.2 0X2C3.2 U17.3
ADDR4: 0X2A4.2 0X2B4.2 0X2C4.2 U22.3
ADDR5: 0X2A5.2 0X2B5.2 0X2C5.2 U27.3
EN: J1.71 R12.1 U4.3
EN1: J2.71 R10.1 U6.3
EN2: J3.71 R19.1 U11.3
EN3: J4.71 R27.1 U16.3
EN4: J5.71 R35.1 U21.3
EN5: J6.71 R43.1 U26.3
GND: C2.2 C3.2 C4.2 C5.2 C6.2 C7.2 J1.1 J1.33 J1.39 J1.45 J1.75 J1.GND1 J1.GND2 J1.GND3 J1.GND4 J1.GND5 J1.GND6 LED1.C U1.2 U1.4 U1.DIEPAD U2.4 U2.7 U3.4 U3.5 U4.2 U5.1 U5.5 U5.9 U5.11 U5.DIEPAD
GND1: C1.2 C8.2 C9.2 C10.2 C11.2 C12.2 J2.1 J2.33 J2.39 J2.45 J2.75 J2.GND1 J2.GND2 J2.GND3 J2.GND4 J2.GND5 J2.GND6 LED2.C U6.2 U7.1 U7.5 U7.9 U7.11 U7.DIEPAD U8.4 U8.5 U9.2 U9.4 U9.DIEPAD U10.4 U10.7
GND2: C13.2 C14.2 C15.2 C16.2 C17.2 C18.2 J3.1 J3.33 J3.39 J3.45 J3.75 J3.GND1 J3.GND2 J3.GND3 J3.GND4 J3.GND5 J3.GND6 LED3.C U11.2 U12.1 U12.5 U12.9 U12.11 U12.DIEPAD U13.4 U13.5 U14.2 U14.4 U14.DIEPAD U15.4 U15.7
GND3: C19.2 C20.2 C21.2 C22.2 C23.2 C24.2 J4.1 J4.33 J4.39 J4.45 J4.75 J4.GND1 J4.GND2 J4.GND3 J4.GND4 J4.GND5 J4.GND6 LED4.C U16.2 U17.1 U17.5 U17.9 U17.11 U17.DIEPAD U18.4 U18.5 U19.2 U19.4 U19.DIEPAD U20.4 U20.7
GND4: C25.2 C26.2 C27.2 C28.2 C29.2 C30.2 J5.1 J5.33 J5.39 J5.45 J5.75 J5.GND1 J5.GND2 J5.GND3 J5.GND4 J5.GND5 J5.GND6 LED5.C U21.2 U22.1 U22.5 U22.9 U22.11 U22.DIEPAD U23.4 U23.5 U24.2 U24.4 U24.DIEPAD U25.4 U25.7
GND5: C31.2 C32.2 C33.2 C34.2 C35.2 C36.2 J6.1 J6.33 J6.39 J6.45 J6.75 J6.GND1 J6.GND2 J6.GND3 J6.GND4 J6.GND5 J6.GND6 LED6.C U26.2 U27.1 U27.5 U27.9 U27.11 U27.DIEPAD U28.4 U28.5 U29.2 U29.4 U29.DIEPAD U30.4 U30.7
N$1: PWR\.1 R3.2
N$2: C7.1 R7.2 U1.1
N$3: JP1.3 R1.2
N$4: JP1.1 R2.2
N$5: 0X2A.1 R4.2
N$6: 0X2B.1 R5.2
N$7: 0X2C.1 R6.2
N$8: LED2.A R11.1
N$9: PWR\1.1 R11.2
N$10: LED1.A R3.1
N$11: 0X2A1.1 R13.2
N$12: 0X2B1.1 R14.2
N$13: 0X2C1.1 R15.2
N$14: C12.1 R16.2 U9.1
N$15: JP2.3 R8.2
N$16: JP2.1 R9.2
N$17: LED3.A R20.1
N$18: PWR\2.1 R20.2
N$19: 0X2A2.1 R21.2
N$20: 0X2B2.1 R22.2
N$21: 0X2C2.1 R23.2
N$22: C18.1 R24.2 U14.1
N$23: JP3.3 R17.2
N$24: JP3.1 R18.2
N$25: LED4.A R28.1
N$26: PWR\3.1 R28.2
N$27: 0X2A3.1 R29.2
N$28: 0X2B3.1 R30.2
N$29: 0X2C3.1 R31.2
N$30: C24.1 R32.2 U19.1
N$31: JP4.3 R25.2
N$32: JP4.1 R26.2
N$33: LED5.A R36.1
N$34: PWR\4.1 R36.2
N$35: 0X2A4.1 R37.2
N$36: 0X2B4.1 R38.2
N$37: 0X2C4.1 R39.2
N$38: C30.1 R40.2 U24.1
N$39: JP5.3 R33.2
N$40: JP5.1 R34.2
N$41: LED6.A R44.1
N$42: PWR\5.1 R44.2
N$43: 0X2A5.1 R45.2
N$44: 0X2B5.1 R46.2
N$45: 0X2C5.1 R47.2
N$46: C36.1 R48.2 U29.1
N$47: JP6.3 R41.2
N$48: JP6.1 R42.2
SCL: J1.21 R1.1 U1.6 U2.6 U3.2 U5.4
SCL1: J2.21 R8.1 U7.4 U8.2 U9.6 U10.6
SCL2: J3.21 R17.1 U12.4 U13.2 U14.6 U15.6
SCL3: J4.21 R25.1 U17.4 U18.2 U19.6 U20.6
SCL4: J5.21 R33.1 U22.4 U23.2 U24.6 U25.6
SCL5: J6.21 R41.1 U27.4 U28.2 U29.6 U30.6
SDA: J1.19 R2.1 U1.3 U2.5 U3.3 U5.7
SDA1: J2.19 R9.1 U7.7 U8.3 U9.3 U10.5
SDA2: J3.19 R18.1 U12.7 U13.3 U14.3 U15.5
SDA3: J4.19 R26.1 U17.7 U18.3 U19.3 U20.5
SDA4: J5.19 R34.1 U22.7 U23.3 U24.3 U25.5
SDA5: J6.19 R42.1 U27.7 U28.3 U29.3 U30.5
VCC: C6.1 J1.72 J1.74 R12.2 U4.1
VCC1: C8.1 J2.72 J2.74 R10.2 U6.1
VCC2: C14.1 J3.72 J3.74 R19.2 U11.1
VCC3: C20.1 J4.72 J4.74 R27.2 U16.1
VCC4: C26.1 J5.72 J5.74 R35.2 U21.1
VCC5: C32.1 J6.72 J6.74 R43.2 U26.1

## Tracks (layer width: path | path; a pad name or v marks a point on that pad's centre or on a via)
3.3V  (via drill 0.3)  (1 unrouted)
  Top 0.254: 10.85,24.94 10.85,56.29 8.17,58.97 PWR\.2
  Top 0.305: U4.5 14.75,15.54 | 14.75,15.54 14.75,16.41 C5.1 14.52,24 14.54,24.02 | v19,24.13 17.31,24.13 R4.1 R5.1 14.54,24.02 | 14.75,15.54 23.77,15.54 23.95,15.37 U2.8 23.95,12.32 v24.08,12.19 | C3.1 23.33,24.38 v23.98,24.38 U1.5 | 26.62,40.39 26.62,39.57 C2.1 26.87,38.1 | 26.87,38.1 26.89,38.1 26.89,35.6 C4.1 26.87,35.05 26.36,34.54 U3.1 | 26.87,38.1 v25.86,38.1 | JP1.2 32.73,9.91 v32.71,9.92 | R7.1 29.22,26.35 v28.75,26.82 | 10.85,24.94 11.62,24.17 R6.1 14.39,24.17 14.54,24.02
  Bottom 0.305: 24.56,26.82 24.56,29.87 25.86,31.17 v25.86,38.1 | 24.56,26.82 24.56,24.61 24.33,24.38 v23.98,24.38 19.25,24.38 v19,24.13 | v32.71,9.92 26.35,9.92 v24.08,12.19 | v28.75,26.82 24.56,26.82
  pour Top (isolate 0.305, no thermals): 26.52,41.17 26.52,40.79 26.39,40.67 26.39,40.16 26.87,40.16 26.87,40.72 26.77,40.82 26.77,41.17
3.3V1  (via drill 0.3)  (1 unrouted)
  Top 0.254: 49.35,24.94 49.35,56.29 46.67,58.97 PWR\1.2
  Top 0.305: U6.5 53.26,15.54 | 53.26,15.54 53.26,16.41 C1.1 53.02,24 53.04,24.02 | v57.51,24.13 55.82,24.13 R13.1 R14.1 53.04,24.02 | 53.26,15.54 62.28,15.54 62.46,15.37 U10.8 62.46,12.32 v62.59,12.19 | C10.1 61.84,24.38 v62.49,24.38 U9.5 | 65.13,40.39 65.13,39.57 C11.1 65.38,38.1 | 65.38,38.1 65.39,38.1 65.39,35.6 C9.1 65.38,35.05 64.87,34.54 U8.1 | 65.38,38.1 v64.37,38.1 | JP2.2 71.24,9.91 v71.22,9.92 | R16.1 67.73,26.35 v67.26,26.82 | 49.35,24.94 50.13,24.17 R15.1 52.9,24.17 53.04,24.02
  Bottom 0.305: 63.07,26.82 63.07,29.87 64.37,31.17 v64.37,38.1 | 63.07,26.82 63.07,24.61 62.84,24.38 v62.49,24.38 57.76,24.38 v57.51,24.13 | v71.22,9.92 64.86,9.92 v62.59,12.19 | v67.26,26.82 63.07,26.82
  pour Top (isolate 0.305, no thermals): 65.03,41.17 65.03,40.79 64.9,40.67 64.9,40.16 65.38,40.16 65.38,40.72 65.28,40.82 65.28,41.17
3.3V2  (via drill 0.3)  (1 unrouted)
  Top 0.254: 87.86,24.94 87.86,56.29 85.18,58.97 PWR\2.2
  Top 0.305: U11.5 91.76,15.54 | 91.76,15.54 91.76,16.41 C13.1 91.53,24 91.55,24.02 | v96.02,24.13 94.33,24.13 R21.1 R22.1 91.55,24.02 | 91.76,15.54 100.79,15.54 100.97,15.37 U15.8 100.97,12.32 v101.09,12.19 | C16.1 100.35,24.38 v100.99,24.38 U14.5 | 103.64,40.39 103.64,39.57 C17.1 103.89,38.1 | 103.89,38.1 103.9,38.1 103.9,35.6 C15.1 103.89,35.05 103.37,34.54 U13.1 | 103.89,38.1 v102.87,38.1 | JP3.2 109.75,9.91 v109.73,9.92 | R24.1 106.24,26.35 v105.77,26.82 | 87.86,24.94 88.64,24.17 R23.1 91.4,24.17 91.55,24.02
  Bottom 0.305: 101.58,26.82 101.58,29.87 102.87,31.17 v102.87,38.1 | 101.58,26.82 101.58,24.61 101.35,24.38 v100.99,24.38 96.27,24.38 v96.02,24.13 | v109.73,9.92 103.36,9.92 v101.09,12.19 | v105.77,26.82 101.58,26.82
  pour Top (isolate 0.305, no thermals): 103.53,41.17 103.53,40.79 103.41,40.67 103.41,40.16 103.89,40.16 103.89,40.72 103.79,40.82 103.79,41.17
3.3V3  (via drill 0.3)  (1 unrouted)
  Top 0.254: 40.87,111.41 40.87,80.06 43.55,77.38 PWR\3.2
  Top 0.305: U16.5 36.97,120.81 | 36.97,120.81 36.97,119.94 C19.1 37.2,112.35 37.18,112.33 | v32.72,112.22 34.41,112.22 R29.1 R30.1 37.18,112.33 | 36.97,120.81 27.94,120.81 27.77,120.98 U20.8 27.77,124.03 v27.64,124.16 | C22.1 28.39,111.97 v27.74,111.97 U19.5 | 25.1,95.96 25.1,96.78 C23.1 24.84,98.25 | 24.84,98.25 24.83,98.25 24.83,100.75 C21.1 24.84,101.3 25.36,101.81 U18.1 | 24.84,98.25 v25.86,98.25 | JP4.2 18.98,126.44 v19,126.43 | R32.1 22.49,110 v22.96,109.53 | 40.87,111.41 40.1,112.18 R31.1 37.33,112.18 37.18,112.33
  Bottom 0.305: 27.16,109.53 27.16,106.48 25.86,105.18 v25.86,98.25 | 27.16,109.53 27.16,111.74 27.38,111.97 v27.74,111.97 32.46,111.97 v32.72,112.22 | v19,126.43 25.37,126.43 v27.64,124.16 | v22.96,109.53 27.16,109.53
  pour Top (isolate 0.305, no thermals): 25.2,95.18 25.2,95.56 25.33,95.68 25.33,96.19 24.84,96.19 24.84,95.63 24.95,95.53 24.95,95.18
3.3V4  (via drill 0.3)  (1 unrouted)
  Top 0.254: 79.38,111.41 79.38,80.06 82.06,77.38 PWR\4.2
  Top 0.305: U21.5 75.48,120.81 | 75.48,120.81 75.48,119.94 C25.1 75.71,112.35 75.69,112.33 | v71.22,112.22 72.91,112.22 R37.1 R38.1 75.69,112.33 | 75.48,120.81 66.45,120.81 66.27,120.98 U25.8 66.27,124.03 v66.14,124.16 | C28.1 66.89,111.97 v66.25,111.97 U24.5 | 63.6,95.96 63.6,96.78 C29.1 63.35,98.25 | 63.35,98.25 63.34,98.25 C27.1 63.35,101.3 63.87,101.81 U23.1 | 63.35,98.25 v64.37,98.25 | JP5.2 57.49,126.44 v57.51,126.43 | R40.1 61,110 v61.47,109.53 | 79.38,111.41 78.6,112.18 R39.1 75.84,112.18 75.69,112.33
  Bottom 0.305: 65.66,109.53 65.66,106.48 64.37,105.18 v64.37,98.25 | 65.66,109.53 65.66,111.74 65.89,111.97 v66.25,111.97 70.97,111.97 v71.22,112.22 | v57.51,126.43 63.88,126.43 v66.14,124.16 | v61.47,109.53 65.66,109.53
  pour Top (isolate 0.305, no thermals): 63.71,95.18 63.71,95.56 63.83,95.68 63.83,96.19 63.35,96.19 63.35,95.63 63.45,95.53 63.45,95.18
3.3V5  (via drill 0.3)  (1 unrouted)
  Top 0.254: 117.89,111.41 117.89,80.06 120.57,77.38 PWR\5.2
  Top 0.305: U26.5 113.98,120.81 | 113.98,120.81 113.98,119.94 C31.1 114.22,112.35 114.2,112.33 | v109.73,112.22 111.42,112.22 R45.1 R46.1 114.2,112.33 | 113.98,120.81 104.96,120.81 104.78,120.98 U30.8 104.78,124.03 v104.65,124.16 | C34.1 105.4,111.97 v104.76,111.97 U29.5 | 102.11,95.96 102.11,96.78 C35.1 101.86,98.25 | 101.86,98.25 101.85,98.25 C33.1 101.86,101.3 102.38,101.81 U28.1 | 101.86,98.25 v102.88,98.25 | JP6.2 96,126.44 v96.02,126.43 | R48.1 99.51,110 v99.98,109.53 | 117.89,111.41 117.11,112.18 R47.1 114.34,112.18 114.2,112.33
  Bottom 0.305: 104.17,109.53 104.17,106.48 102.88,105.18 v102.88,98.25 | 104.17,109.53 104.17,111.74 104.4,111.97 v104.76,111.97 109.48,111.97 v109.73,112.22 | v96.02,126.43 102.38,126.43 v104.65,124.16 | v99.98,109.53 104.17,109.53
  pour Top (isolate 0.305, no thermals): 102.21,95.18 102.21,95.56 102.34,95.68 102.34,96.19 101.86,96.19 101.86,95.63 101.96,95.53 101.96,95.18
A0  (via drill 0.3)
  Top 0.203: v24.08,7.11 23.95,7.24 U2.1
  Bottom 0.203: J1.36 26.36,4.83 v24.08,7.11
A1  (via drill 0.3)
  Top 0.203: v25.35,6.86 25.35,8.5 U2.2
  Bottom 0.203: J1.34 26.86,5.35 v25.35,6.86
A2  (via drill 0.3)
  Top 0.203: v26.62,6.86 26.62,8.5 U2.3
  Bottom 0.203: J1.32 27.36,6.12 v26.62,6.86
A3  (via drill 0.3)
  Top 0.203: v62.59,7.11 62.46,7.24 U10.1
  Bottom 0.203: J2.36 64.87,4.83 v62.59,7.11
A4  (via drill 0.3)
  Top 0.203: v65.13,6.86 65.13,8.5 U10.3
  Bottom 0.203: J2.32 65.87,6.12 v65.13,6.86
A5  (via drill 0.3)
  Top 0.203: v63.86,6.86 63.86,8.5 U10.2
  Bottom 0.203: J2.34 65.37,5.35 v63.86,6.86
A6  (via drill 0.3)
  Top 0.203: v101.09,7.11 100.97,7.24 U15.1
  Bottom 0.203: J3.36 103.37,4.83 v101.09,7.11
A7  (via drill 0.3)
  Top 0.203: v103.64,6.86 103.64,8.5 U15.3
  Bottom 0.203: J3.32 104.37,6.12 v103.64,6.86
A8  (via drill 0.3)
  Top 0.203: v102.37,6.86 102.37,8.5 U15.2
  Bottom 0.203: J3.34 103.87,5.35 v102.37,6.86
A9  (via drill 0.3)
  Top 0.203: v27.64,129.24 27.77,129.11 U20.1
  Bottom 0.203: J4.36 25.36,131.52 v27.64,129.24
A10  (via drill 0.3)
  Top 0.203: v25.1,129.49 25.1,127.85 U20.3
  Bottom 0.203: J4.32 24.36,130.23 v25.1,129.49
A11  (via drill 0.3)
  Top 0.203: v26.37,129.49 26.37,127.85 U20.2
  Bottom 0.203: J4.34 24.86,131 v26.37,129.49
A12  (via drill 0.3)
  Top 0.203: v66.14,129.24 66.27,129.11 U25.1
  Bottom 0.203: J5.36 63.87,131.52 v66.14,129.24
A13  (via drill 0.3)
  Top 0.203: v63.6,129.49 63.6,127.85 U25.3
  Bottom 0.203: J5.32 62.87,130.23 v63.6,129.49
A14  (via drill 0.3)
  Top 0.203: v64.87,129.49 64.87,127.85 U25.2
  Bottom 0.203: J5.34 63.37,131 v64.87,129.49
A15  (via drill 0.3)
  Top 0.203: v104.65,129.24 104.78,129.11 U30.1
  Bottom 0.203: J6.36 102.38,131.52 v104.65,129.24
A16  (via drill 0.3)
  Top 0.203: v102.11,129.49 102.11,127.85 U30.3
  Bottom 0.203: J6.32 101.38,130.23 v102.11,129.49
A17  (via drill 0.3)
  Top 0.203: v103.38,129.49 103.38,127.85 U30.2
  Bottom 0.203: J6.34 101.88,131 v103.38,129.49
ADDR
  Top 0.203: 0X2C.2 0X2B.2 0X2A.2 18.97,28.73 19.46,28.25 21.84,28.25 23.06,29.46 23.06,41.4 23.53,41.87 U5.3
ADDR1
  Top 0.203: 0X2C1.2 0X2B1.2 0X2A1.2 57.48,28.73 57.96,28.25 60.35,28.25 61.57,29.46 61.57,41.4 62.04,41.87 U7.3
ADDR2
  Top 0.203: 0X2C2.2 0X2B2.2 0X2A2.2 95.99,28.73 96.47,28.25 98.86,28.25 100.08,29.46 100.08,41.4 100.55,41.87 U12.3
ADDR3
  Top 0.203: 0X2C3.2 0X2B3.2 0X2A3.2 32.74,107.62 32.26,108.11 29.87,108.11 28.65,106.89 28.65,94.95 28.18,94.48 U17.3
ADDR4
  Top 0.203: 0X2C4.2 0X2B4.2 0X2A4.2 71.25,107.62 70.77,108.11 68.38,108.11 67.16,106.89 67.16,94.95 66.69,94.48 U22.3
ADDR5
  Top 0.203: 0X2C5.2 0X2B5.2 0X2A5.2 109.76,107.62 109.28,108.11 106.89,108.11 105.67,106.89 105.67,94.95 105.2,94.48 U27.3
EN
  Top 0.203: J1.71 17.61,6.47 16.55,7.53 R12.1 16.55,11.55 U4.3
EN1
  Top 0.203: J2.71 56.12,6.47 55.06,7.53 R10.1 55.06,11.55 U6.3
EN2
  Top 0.203: J3.71 94.62,6.47 93.56,7.53 R19.1 93.56,11.55 U11.3
EN3
  Top 0.203: J4.71 34.11,129.88 35.17,128.82 R27.1 35.17,124.8 U16.3
EN4
  Top 0.203: J5.71 72.62,129.88 73.68,128.82 R35.1 73.68,124.8 U21.3
EN5
  Top 0.203: J6.71 111.12,129.88 112.19,128.82 R43.1 112.19,124.8 U26.3
GND  (via drill 0.3)  (44 unrouted)
  Top 0.203: J1.GND4 42.56,43.2 J1.GND5 42.56,44.8 J1.GND6 | J1.GND1 9.16,43.2 J1.GND2 9.13,44.03 9.13,44.93 7.95,46.1 J1.GND3 | C2.2 24.74,38.89 v24.74,37.44
  Top 0.254: J1.39 25.61,2.54 | 25.61,2.54 25.61,2.66 v24.82,3.45 24.11,2.75 J1.45 | J1.33 27.09,1.29 27.09,2.13 26.67,2.54 25.61,2.54 | J1.75 16.61,2.16 16.34,2.43 16.34,4.05 v15.8,4.6 | J1.1 35.09,1.29 35.09,2.13 34.98,2.24 v34.98,3.45
  other vias: 29.95,19.61 12.34,64.31 27.64,6.93 25.3,15.7 12.93,17.83 12.88,15.01 15.7,12.93 29.9,29.59 23.57,27.51 25.83,45.34 28.24,43.51 27.51,32.84 28.73,25.43 25.86,26.19 25.86,22.4 23.27,43.51 27.71,24.36 23.75,40.59 27.89,37.41 23.93,6.12
  pour Bottom (isolate 0.203, rank 4): 6.81,0 6.81,65.02 44.91,65.02 44.91,0
  pour Top (isolate 0.203, rank 4): 6.81,0 6.81,65.02 44.91,65.02 44.91,0
GND1  (via drill 0.3)  (44 unrouted)
  Top 0.203: J2.GND4 81.07,43.2 J2.GND5 81.07,44.8 J2.GND6 | J2.GND1 47.67,43.2 J2.GND2 47.64,44.03 47.64,44.93 46.46,46.1 J2.GND3 | C11.2 63.25,38.89 v63.25,37.44
  Top 0.254: J2.39 64.12,2.54 | 64.12,2.54 64.12,2.66 v63.32,3.45 62.62,2.75 J2.45 | J2.33 65.6,1.29 65.6,2.13 65.18,2.54 64.12,2.54 | J2.75 55.12,2.16 54.85,2.43 54.85,4.05 v54.31,4.6 | J2.1 73.6,1.29 73.6,2.13 73.48,2.24 v73.48,3.45
  other vias: 68.46,19.61 50.85,64.31 66.14,6.93 63.81,15.7 51.44,17.83 51.39,15.01 54.21,12.93 68.4,29.59 62.08,27.51 64.34,45.34 66.75,43.51 66.02,32.84 67.24,25.43 64.37,26.19 64.37,22.4 61.78,43.51 66.22,24.36 62.26,40.59 66.4,37.41 62.44,6.12
  pour Bottom (isolate 0.203, rank 4): 45.32,0 45.32,65.02 83.42,65.02 83.42,0
  pour Top (isolate 0.203, rank 4): 45.32,0 45.32,65.02 83.42,65.02 83.42,0
GND2  (via drill 0.3)  (44 unrouted)
  Top 0.203: J3.GND4 119.57,43.2 J3.GND5 119.57,44.8 J3.GND6 | J3.GND1 86.17,43.2 J3.GND2 86.14,44.03 86.14,44.93 84.97,46.1 J3.GND3 | C17.2 101.76,38.89 v101.76,37.44
  Top 0.254: J3.39 102.62,2.54 | 102.62,2.54 102.62,2.66 v101.83,3.45 101.12,2.75 J3.45 | J3.33 104.1,1.29 104.1,2.13 103.69,2.54 102.62,2.54 | J3.75 93.62,2.16 93.36,2.43 93.36,4.05 v92.81,4.6 | J3.1 112.1,1.29 112.1,2.13 111.99,2.24 v111.99,3.45
  other vias: 106.96,19.61 89.36,64.31 104.65,6.93 102.31,15.7 89.94,17.83 89.89,15.01 92.71,12.93 106.91,29.59 100.59,27.51 102.85,45.34 105.26,43.51 104.52,32.84 105.74,25.43 102.87,26.19 102.87,22.4 100.28,43.51 104.73,24.36 100.76,40.59 104.9,37.41 100.94,6.12
  pour Bottom (isolate 0.203, rank 4): 83.82,0 83.82,65.02 121.92,65.02 121.92,0
  pour Top (isolate 0.203, rank 4): 83.82,0 83.82,65.02 121.92,65.02 121.92,0
GND3  (via drill 0.3)  (44 unrouted)
  Top 0.203: J4.GND4 9.16,93.15 J4.GND5 9.16,91.55 J4.GND6 | J4.GND1 42.56,93.15 J4.GND2 42.59,92.32 42.59,91.42 43.76,90.25 J4.GND3 | C23.2 26.98,97.46 v26.98,98.91
  Top 0.254: J4.39 26.11,133.81 | 26.11,133.81 26.11,133.69 v26.9,132.9 27.61,133.6 J4.45 | J4.33 24.63,135.06 24.63,134.22 25.04,133.81 26.11,133.81 | J4.75 35.11,134.19 35.37,133.92 35.37,132.3 v35.92,131.75 | J4.1 16.63,135.06 16.63,134.22 16.74,134.11 v16.74,132.9
  other vias: 21.77,116.74 39.37,72.04 24.08,129.42 26.42,120.65 38.79,118.52 38.84,121.34 36.02,123.42 21.82,106.76 28.15,108.84 25.89,91.01 23.47,92.84 24.21,103.51 22.99,110.92 25.86,110.16 25.86,113.95 28.45,92.84 24.01,111.99 27.97,95.76 23.83,98.94 27.79,130.23
  pour Bottom (isolate 0.203, rank 4): 44.91,136.35 44.91,71.33 6.81,71.33 6.81,136.35
  pour Top (isolate 0.203, rank 4): 44.91,136.35 44.91,71.33 6.81,71.33 6.81,136.35
GND4  (via drill 0.3)  (44 unrouted)
  Top 0.203: J5.GND4 47.67,93.15 J5.GND5 47.67,91.55 J5.GND6 | J5.GND1 81.07,93.15 J5.GND2 81.1,92.32 81.1,91.42 82.27,90.25 J5.GND3 | C29.2 65.48,97.46 v65.48,98.91
  Top 0.254: J5.39 64.62,133.81 | 64.62,133.81 64.62,133.69 v65.41,132.9 66.12,133.6 J5.45 | J5.33 63.14,135.06 63.14,134.22 63.55,133.81 64.62,133.81 | J5.75 73.62,134.19 73.88,133.92 73.88,132.3 v74.42,131.75 | J5.1 55.14,135.06 55.14,134.22 55.25,134.11 v55.25,132.9
  other vias: 60.28,116.74 77.88,72.04 62.59,129.42 64.92,120.65 77.29,118.52 77.35,121.34 74.53,123.42 60.33,106.76 66.65,108.84 64.39,91.01 61.98,92.84 62.72,103.51 61.5,110.92 64.37,110.16 64.37,113.95 66.96,92.84 62.51,111.99 66.47,95.76 62.33,98.94 66.3,130.23
  pour Bottom (isolate 0.203, rank 4): 83.42,136.35 83.42,71.33 45.32,71.33 45.32,136.35
  pour Top (isolate 0.203, rank 4): 83.42,136.35 83.42,71.33 45.32,71.33 45.32,136.35
GND5  (via drill 0.3)  (44 unrouted)
  Top 0.203: J6.GND4 86.17,93.15 J6.GND5 86.17,91.55 J6.GND6 | J6.GND1 119.58,93.15 J6.GND2 119.61,92.32 119.61,91.42 120.78,90.25 J6.GND3 | C35.2 103.99,97.46 v103.99,98.91
  Top 0.254: J6.39 103.12,133.81 | 103.12,133.81 103.12,133.69 v103.92,132.9 104.62,133.6 J6.45 | J6.33 101.65,135.06 101.65,134.22 102.06,133.81 103.12,133.81 | J6.75 112.12,134.19 112.39,133.92 112.39,132.3 v112.93,131.75 | J6.1 93.65,135.06 93.65,134.22 93.76,134.11 v93.76,132.9
  other vias: 98.79,116.74 116.39,72.04 101.1,129.42 103.43,120.65 115.8,118.52 115.85,121.34 113.04,123.42 98.84,106.76 105.16,108.84 102.9,91.01 100.49,92.84 101.22,103.51 100,110.92 102.88,110.16 102.88,113.95 105.47,92.84 101.02,111.99 104.98,95.76 100.84,98.94 104.81,130.23
  pour Bottom (isolate 0.203, rank 4): 121.93,136.35 121.93,71.33 83.83,71.33 83.83,136.35
  pour Top (isolate 0.203, rank 4): 121.93,136.35 121.93,71.33 83.83,71.33 83.83,136.35
N$1
  Top 0.203: R3.2 13.37,62.15 10.36,62.15 10.21,62 PWR\.1
N$2  (via drill 0.3)
  Top 0.203: U1.1 27.67,23.58 v27.71,23.55 | R7.2 v29.92,23.37 C7.1
  Bottom 0.203: v27.71,23.55 27.89,23.37 v29.92,23.37
N$3
  Top 0.305: JP1.3 32.78,10.95 R1.2
N$4
  Top 0.305: JP1.1 32.83,8.87 R2.2
N$5
  Top 0.203: R4.2 17.22,25.92 0X2A.1
N$6
  Top 0.203: 0X2B.1 R5.2
N$7
  Top 0.203: 0X2C.1 12.27,25.92 R6.2
N$8
  Top 0.203: R11.1 52.65,61.23 LED2.A
N$9
  Top 0.203: R11.2 51.88,62.15 48.87,62.15 48.72,62 PWR\1.1
N$10
  Top 0.203: R3.1 14.15,61.23 LED1.A
N$11
  Top 0.203: R13.2 55.73,25.92 0X2A1.1
N$12
  Top 0.203: 0X2B1.1 R14.2
N$13
  Top 0.203: 0X2C1.1 50.78,25.92 R15.2
N$14  (via drill 0.3)
  Top 0.203: U9.1 66.18,23.58 v66.22,23.55 | R16.2 v68.43,23.37 C12.1
  Bottom 0.203: v66.22,23.55 66.4,23.37 v68.43,23.37
N$15
  Top 0.305: JP2.3 71.29,10.95 R8.2
N$16
  Top 0.305: JP2.1 71.34,8.87 R9.2
N$17
  Top 0.203: R20.1 91.16,61.23 LED3.A
N$18
  Top 0.203: R20.2 90.39,62.15 87.38,62.15 87.23,62 PWR\2.1
N$19
  Top 0.203: R21.2 94.24,25.92 0X2A2.1
N$20
  Top 0.203: 0X2B2.1 R22.2
N$21
  Top 0.203: 0X2C2.1 89.28,25.92 R23.2
N$22  (via drill 0.3)
  Top 0.203: U14.1 104.69,23.58 v104.73,23.55 | R24.2 v106.94,23.37 C18.1
  Bottom 0.203: v104.73,23.55 104.91,23.37 v106.94,23.37
N$23
  Top 0.305: JP3.3 109.79,10.95 R17.2
N$24
  Top 0.305: JP3.1 109.84,8.87 R18.2
N$25
  Top 0.203: R28.1 37.57,75.12 LED4.A
N$26
  Top 0.203: R28.2 38.34,74.2 41.35,74.2 41.51,74.35 PWR\3.1
N$27
  Top 0.203: R29.2 34.5,110.43 0X2A3.1
N$28
  Top 0.203: 0X2B3.1 R30.2
N$29
  Top 0.203: 0X2C3.1 39.45,110.43 R31.2
N$30  (via drill 0.3)
  Top 0.203: U19.1 24.04,112.77 v24.01,112.8 | R32.2 v21.8,112.98 C24.1
  Bottom 0.203: v24.01,112.8 23.83,112.98 v21.8,112.98
N$31
  Top 0.305: JP4.3 18.94,125.4 R25.2
N$32
  Top 0.305: JP4.1 18.89,127.48 R26.2
N$33
  Top 0.203: R36.1 76.08,75.12 LED5.A
N$34
  Top 0.203: R36.2 76.85,74.2 79.86,74.2 80.01,74.35 PWR\4.1
N$35
  Top 0.203: R37.2 73,110.43 0X2A4.1
N$36
  Top 0.203: 0X2B4.1 R38.2
N$37
  Top 0.203: 0X2C4.1 77.95,110.43 R39.2
N$38  (via drill 0.3)
  Top 0.203: U24.1 62.55,112.77 v62.51,112.8 | R40.2 v60.3,112.98 C30.1
  Bottom 0.203: v62.51,112.8 62.33,112.98 v60.3,112.98
N$39
  Top 0.305: JP5.3 57.45,125.4 R33.2
N$40
  Top 0.305: JP5.1 57.39,127.48 R34.2
N$41
  Top 0.203: R44.1 114.59,75.12 LED6.A
N$42
  Top 0.203: R44.2 115.36,74.2 118.37,74.2 118.52,74.35 PWR\5.1
N$43
  Top 0.203: R45.2 111.51,110.43 0X2A5.1
N$44
  Top 0.203: 0X2B5.1 R46.2
N$45
  Top 0.203: 0X2C5.1 116.46,110.43 R47.2
N$46  (via drill 0.3)
  Top 0.203: U29.1 101.06,112.77 v101.02,112.8 | R48.2 v98.81,112.98 C36.1
  Bottom 0.203: v101.02,112.8 100.84,112.98 v98.81,112.98
N$47
  Top 0.305: JP6.3 95.95,125.4 R41.2
N$48
  Top 0.305: JP6.1 95.9,127.48 R42.2
SCL
  Top 0.203: J1.21 30.11,5.31 29.59,5.83 29.59,10.54 30.1,11.05 R1.1 30.98,11.82 30.3,12.5 27.18,12.5 26.49,13.18 U2.6 26.49,20.45 24.71,22.23 U1.6 22.71,23.58 22.1,24.19 22.1,27.41 24.33,29.64 24.33,33.53 24.59,33.78 25.32,33.78 U3.2 25.36,34.43 24.99,34.8 24.33,34.8 24.08,35.05 24.08,39.62 25.06,40.6 U5.4
SCL1
  Top 0.203: J2.21 68.62,5.31 68.1,5.83 68.1,10.54 68.61,11.05 R8.1 69.48,11.82 68.81,12.5 65.69,12.5 65,13.18 U10.6 65,20.45 63.22,22.23 U9.6 61.22,23.58 60.61,24.19 60.61,27.41 62.84,29.64 62.84,33.53 63.1,33.78 63.83,33.78 U8.2 63.87,34.43 63.5,34.8 62.84,34.8 62.59,35.05 62.59,39.62 63.57,40.6 U7.4
SCL2
  Top 0.203: J3.21 107.12,5.31 106.61,5.83 106.61,10.54 107.11,11.05 R17.1 107.99,11.82 107.32,12.5 104.19,12.5 103.51,13.18 U15.6 103.51,20.45 101.72,22.23 U14.6 99.72,23.58 99.11,24.19 99.11,27.41 101.35,29.64 101.35,33.53 101.6,33.78 102.34,33.78 U13.2 102.37,34.43 102.01,34.8 101.35,34.8 101.09,35.05 101.09,39.62 102.07,40.6 U12.4
SCL3
  Top 0.203: J4.21 21.61,131.04 22.13,130.53 22.13,125.81 21.62,125.3 R25.1 20.74,124.53 21.41,123.85 24.54,123.85 25.23,123.17 U20.6 25.23,115.9 27.01,114.12 U19.6 29.01,112.77 29.62,112.16 29.62,108.94 27.38,106.71 27.38,102.82 27.13,102.57 26.4,102.57 U18.2 26.36,101.92 26.72,101.55 27.38,101.55 27.64,101.3 27.64,96.73 26.66,95.75 U17.4
SCL4
  Top 0.203: J5.21 60.12,131.04 60.63,130.53 60.63,125.81 60.12,125.3 R33.1 59.25,124.53 59.92,123.85 63.04,123.85 63.73,123.17 U25.6 63.73,115.9 65.52,114.12 U24.6 67.52,112.77 68.12,112.16 68.12,108.94 65.89,106.71 65.89,102.82 65.64,102.57 64.9,102.57 U23.2 64.87,101.92 65.23,101.55 65.89,101.55 66.14,101.3 66.14,96.73 65.17,95.75 U22.4
SCL5
  Top 0.203: J6.21 98.62,131.04 99.14,130.53 99.14,125.81 98.63,125.3 R41.1 97.76,124.53 98.43,123.85 101.55,123.85 102.24,123.17 U30.6 102.24,115.9 104.03,114.12 U29.6 106.03,112.77 106.63,112.16 106.63,108.94 104.4,106.71 104.4,102.82 104.15,102.57 103.41,102.57 U28.2 103.38,101.92 103.74,101.55 104.4,101.55 104.65,101.3 104.65,96.73 103.67,95.75 U27.4
SDA
  Top 0.203: J1.19 30.61,5.54 30.1,6.05 30.1,8.81 30.3,9.02 R2.1 30.98,9.6 31.81,10.43 31.81,11.94 30.79,12.95 28.19,12.95 27.76,13.39 U2.5 27.76,21.21 28.27,21.72 28.27,24.69 27.78,25.18 U1.3 26.87,25.32 26.87,29.72 25.98,30.61 | 25.98,30.61 25.36,31.23 U3.3 | U5.7 27.77,41.87 28.52,41.11 28.52,32.13 27.86,31.46 26.84,31.46 25.98,30.61
SDA1
  Top 0.203: J2.19 69.12,5.54 68.61,6.05 68.61,8.81 68.81,9.02 R9.1 69.48,9.6 70.31,10.43 70.31,11.94 69.3,12.95 66.7,12.95 66.27,13.39 U10.5 66.27,21.21 66.78,21.72 66.78,24.69 66.28,25.18 U9.3 65.38,25.32 65.38,29.72 64.49,30.61 | 64.49,30.61 63.87,31.23 U8.3 | U7.7 66.27,41.87 67.03,41.11 67.03,32.13 66.37,31.46 65.35,31.46 64.49,30.61
SDA2
  Top 0.203: J3.19 107.62,5.54 107.11,6.05 107.11,8.81 107.32,9.02 R18.1 107.99,9.6 108.82,10.43 108.82,11.94 107.81,12.95 105.21,12.95 104.78,13.39 U15.5 104.78,21.21 105.29,21.72 105.29,24.69 104.79,25.18 U14.3 103.89,25.32 103.89,29.72 103,30.61 | 103,30.61 102.37,31.23 U13.3 | U12.7 104.78,41.87 105.54,41.11 105.54,32.13 104.87,31.46 103.86,31.46 103,30.61
SDA3
  Top 0.203: J4.19 21.11,130.81 21.62,130.3 21.62,127.54 21.41,127.33 R26.1 20.74,126.75 19.91,125.92 19.91,124.41 20.93,123.4 23.52,123.4 23.96,122.96 U20.5 23.96,115.14 23.45,114.63 23.45,111.66 23.94,111.17 U19.3 24.84,111.03 24.84,106.63 25.73,105.74 | 25.73,105.74 26.36,105.12 U18.3 | U17.7 23.95,94.48 23.19,95.24 23.19,104.22 23.86,104.89 24.88,104.89 25.73,105.74
SDA4
  Top 0.203: J5.19 59.62,130.81 60.12,130.3 60.12,127.54 59.92,127.33 R34.1 59.25,126.75 58.42,125.92 58.42,124.41 59.43,123.4 62.03,123.4 62.46,122.96 U25.5 62.46,115.14 61.95,114.63 61.95,111.66 62.45,111.17 U24.3 63.35,111.03 63.35,106.63 64.24,105.74 | 64.24,105.74 64.87,105.12 U23.3 | U22.7 62.46,94.48 61.7,95.24 61.7,104.22 62.37,104.89 63.38,104.89 64.24,105.74
SDA5
  Top 0.203: J6.19 98.12,130.81 98.63,130.3 98.63,127.54 98.43,127.33 R42.1 97.76,126.75 96.93,125.92 96.93,124.41 97.94,123.4 100.54,123.4 100.97,122.96 U30.5 100.97,115.14 100.46,114.63 100.46,111.66 100.96,111.17 U29.3 101.86,111.03 101.86,106.63 102.75,105.74 | 102.75,105.74 103.38,105.12 U28.3 | U27.7 100.97,94.48 100.21,95.24 100.21,104.22 100.88,104.89 101.89,104.89 102.75,105.74
VCC  (via drill 0.3)  (2 unrouted)
  Top 0.305: v16.99,3.33 16.99,4.8 14.85,6.95 R12.2 14.75,9.75 U4.1 13.1,11.65 C6.1
  pour Bottom (isolate 0.305, no thermals): 16.31,0.61 16.31,3.81 17.4,3.81 17.4,0.61
VCC1  (via drill 0.3)  (2 unrouted)
  Top 0.305: v55.5,3.33 55.5,4.8 53.36,6.95 R10.2 53.26,9.75 U6.1 51.61,11.65 C8.1
  pour Bottom (isolate 0.305, no thermals): 54.82,0.61 54.82,3.81 55.91,3.81 55.91,0.61
VCC2  (via drill 0.3)  (2 unrouted)
  Top 0.305: v94.01,3.33 94.01,4.8 91.86,6.95 R19.2 91.76,9.75 U11.1 90.12,11.65 C14.1
  pour Bottom (isolate 0.305, no thermals): 93.32,0.61 93.32,3.81 94.41,3.81 94.41,0.61
VCC3  (via drill 0.3)  (2 unrouted)
  Top 0.305: v34.72,133.02 34.72,131.55 36.87,129.4 R27.2 36.97,126.6 U16.1 38.62,124.7 C20.1
  pour Bottom (isolate 0.305, no thermals): 35.41,135.74 35.41,132.54 34.32,132.54 34.32,135.74
VCC4  (via drill 0.3)  (2 unrouted)
  Top 0.305: v73.23,133.02 73.23,131.55 75.38,129.4 R35.2 75.48,126.6 U21.1 77.12,124.7 C26.1
  pour Bottom (isolate 0.305, no thermals): 73.92,135.74 73.92,132.54 72.82,132.54 72.82,135.74
VCC5  (via drill 0.3)  (2 unrouted)
  Top 0.305: v111.74,133.02 111.74,131.55 113.89,129.4 R43.2 113.98,126.6 U26.1 115.63,124.7 C32.1
  pour Bottom (isolate 0.305, no thermals): 112.43,135.74 112.43,132.54 111.33,132.54 111.33,135.74

## Text on the board
Bottom: v10 | v10 | v10 | v10 | v10 | v10
Milling: v-score | v-score | v-score | v-score | v-score | Do not remove | Do not remove | Do not remove | v-score